# Altium PCB RadarControl_V1.00.PcbDoc
Units mil, origin at the board's own origin, x right, y up, seen from the top; angles counter-clockwise.
Board outline 6000 x 4000 mil, 2 copper layers (Top Layer, Bottom Layer); 75 components, 66 nets, 258 pads, 19 vias.
Unrouted connection lines stored in the file: 138.
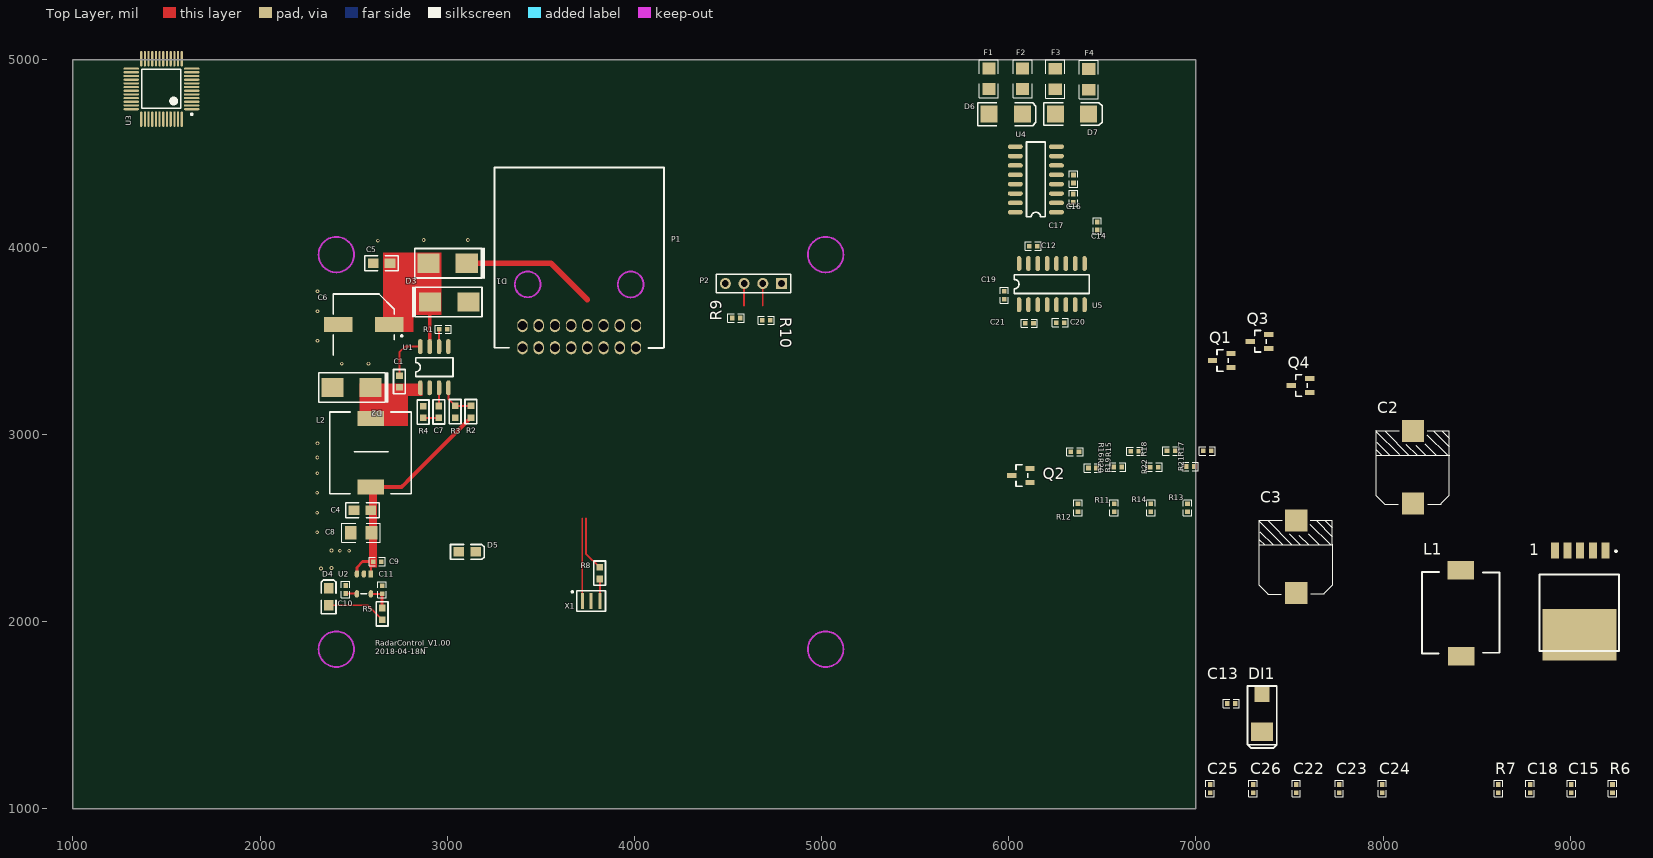
[diagram p0: Top Layer view]
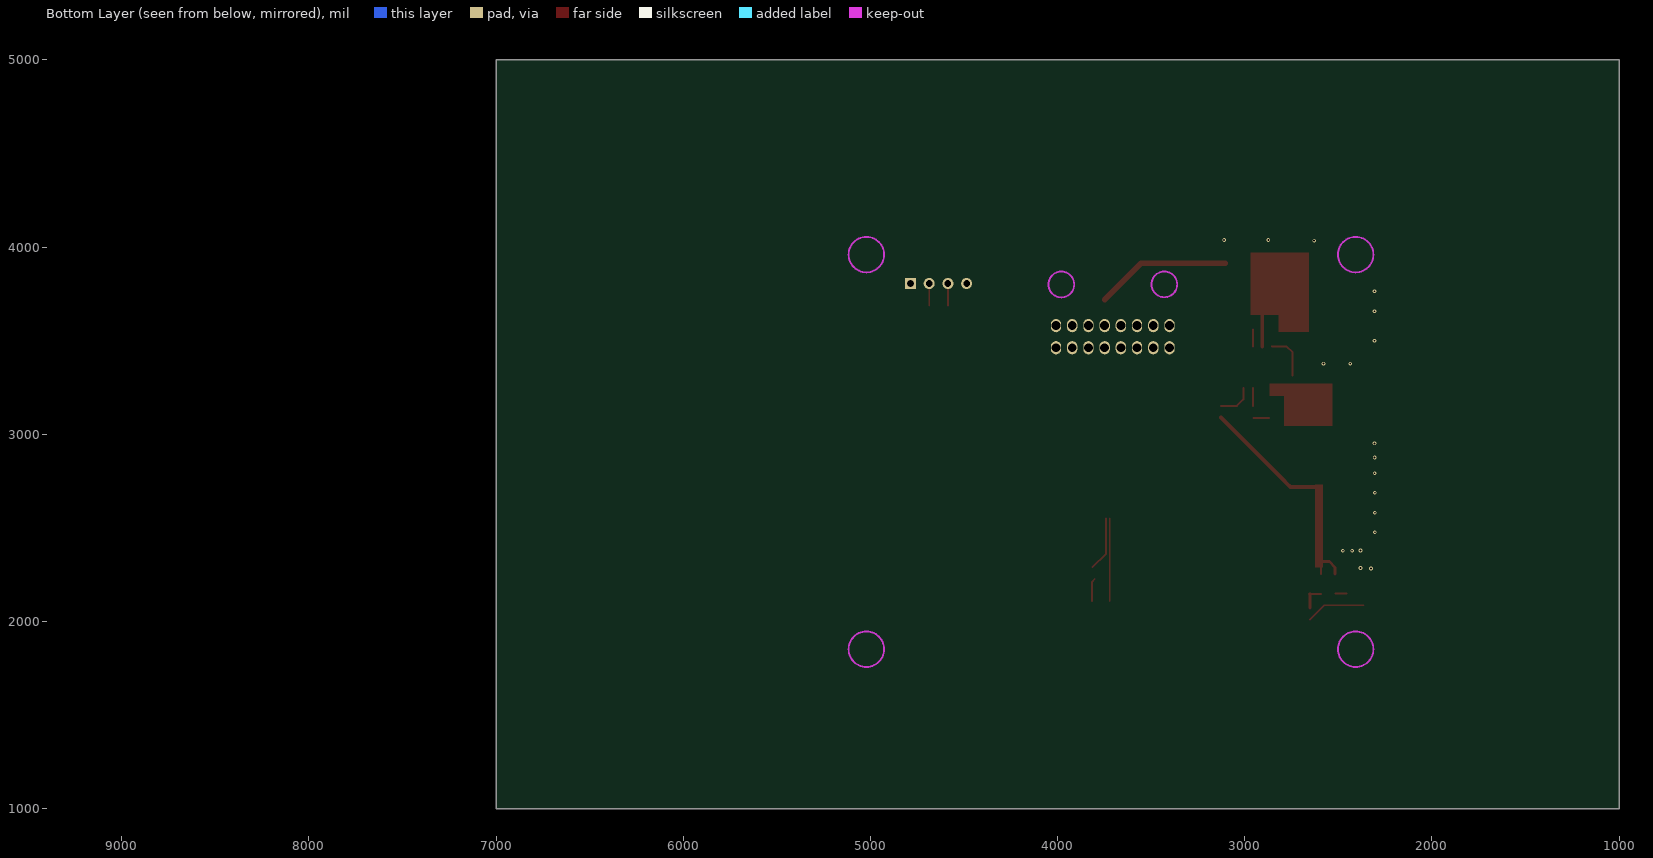
[diagram p1: Bottom Layer view, seen from below]

## Layer stack, top to bottom
Top Solder: solder mask 0.4, Solder Resist, Dk 3.5
Top Layer: signal copper 1.4
Dielectric1: dielectric 12.6, FR-4, Dk 4.8
Bottom Layer: signal copper 1.4
Bottom Solder: solder mask 0.4, Solder Resist, Dk 3.5

## Board outline
1000,1000 7000,1000 7000,5000 1000,5000

## Design rules (kind name [scope] priority, off if disabled: settings)
Clearance [All] p1: gap=5
FabricationTestpoint [(IsPad And (OnTopLayer Or OnBottomLayer))] p1: side=3 testpointundercomponent=TRUE minsize=40 maxsize=100 preferedsize=60 minholesize=0 maxholesize=40 preferedholesize=32 testpointgrid=1 allowsidetop=TRUE allowsidebottom=TRUE usegrid=TRUE gridtolerance=0.01
MinimumSolderMaskSliver [All] p1 off: minsoldermaskwidth=10
PolygonConnect [All] p1: connectstyle=Relief reliefconductorwidth=10 reliefentries=4 polygonreliefangle="90 Angle" airgapwidth=10
RoutingVias [All] p1: holewidth=28 width=50 viastyle="Through Hole" minholewidth=28 minwidth=50 maxholewidth=28 maxwidth=50
SilkToSilkClearance [All] p1 off: silktosilkclearance=10
SilkToSolderMaskClearance [IsPad] p1 off: minsilkscreentomaskgap=10 clearancetoexposedcopper=TRUE
SolderMaskExpansion [All] p1: expansion=4
Width [All] p1: maxlimit=30 minlimit=10 preferedwidth=10
26 further rules are at their usual default settings.

## Components (designator, comment, footprint, x,y, rotation, side; value= is the part's Value field where it differs from the comment)
1 "LM2576/LM2576HV-12.0" LM25761 9261,1842 r90 top
C1 "100nF" 0603 2749,3220 r180 top
C2 "Cap Pol1" Cap-100uF-220uF 8243,2593 r90 top
C3 "Cap Pol1" Cap-100uF-220uF 7618,2114 r90 top
C4 "22uF" 0805 2547,2594 r0 top
C5 "10uF" 0805 2649,3914 r0 top
C6 "47uF" cap_pol_8*10.2 2554,3586 r180 top
C7 "150pF" 0603 2960,3058 r180 top
C8 "22uF" 1206 2595,2473 r180 top
C9 "100nF" 0402 2519,2315 r90 top
C10 "NULL" 0402 2461,2064 r180 top
C11 "1uF" 0402 2656,2063 r180 top
C12 "100nf" 0402 6024,4001 r90 top
C13 "100nf" 0402 7083,1557 r90 top
C14 "100nf" 0402 6469,4219 r0 top
C15 "100nf" 0402 9002,1213 r0 top
C16 "100nf" 0402 6350,4257 r180 top
C17 "100nf" 0402 6349,4155 r180 top
C18 "100nf" 0402 8782,1213 r0 top
C19 "100nf" 0402 5972,3849 r0 top
C20 "100nf" 0402 6169,3592 r90 top
C21 "100nf" 0402 6004,3589 r90 top
C22 "100nF" 0402 7532,1213 r0 top
C23 "100nF" 0402 7762,1213 r0 top
C24 "100nF" 0402 7992,1213 r0 top
C25 "100nF" 0402 7072,1213 r0 top
C26 "1uF" 0402 7302,1213 r0 top
D1 "1N4007" B290#1 3103.91,3913.37 r180 top
D2 "B290-13-F" B290#1 2590.72,3250 r180 top
D3 "SMAJ36CA" B290#2 2908,3707 r0 top
D4 "LED_POWER" 0805-LED 2366,2131 r90 top
D5 "LED0" 0805-LED 3107,2371 r0 top
D6 "SMBJ18CA" SMB 5984,4710 r0 top
D7 "SMBJ18CA" SMB 6338,4711 r0 top
DI1 "SS510" SS510 7432,1341 r90 top
F1 "SMD1206-010" 1206 5894,4954 r270 top
F2 "SMD1206-010" 1206 6074,4954 r270 top
F3 "SMD1206-010" 1206 6249,4953 r270 top
F4 "SMD1206-010" 1206 6427,4951 r270 top
L1 "Inductor" GDRH104R-1R0MT 8415,1869 r90 top
L2 "22uH" 10*10Inductor 2591,2718 r0 top
P1 "1318382(16PIN)" "16pin 1318382" 4120,3480 r180 top
P2 "2.54mm/4pin" HDR1X4 4786,3805 r180 top
Q1 "LMBT3904LT1G" LC-SOT-23(SOT-23-3) 7138,3394 r0 top
Q2 "LMBT3904LT1G" LC-SOT-23(SOT-23-3) 6065,2779 r0 top
Q3 "LMBT3904LT1G" LC-SOT-23(SOT-23-3) 7340,3496 r0 top
Q4 "LMBT3904LT1G" LC-SOT-23(SOT-23-3) 7559,3260 r0 top
R1 "200K" 0402 2872,3557 r90 top
R2 "205K" 0603 3131,3059 r180 top
R3 "40.2K" 0603 3038,3181 r0 top
R4 "100k" 0603 2875,3057 r180 top
R5 "510R" 0603 2648,2101 r0 top
R6 "2.2K" 0402 9222,1213 r0 top
R7 "10K" 0402 8612,1213 r0 top
R8 "100" 0603 3810,2319 r0 top
R9 "1K" 0402 4437,3617 r90 top
R10 "1K" 0402 4811,3613 r270 top
R11 "10K" 0402 6567,2500 r180 top
R12 "10K" 0402 6374,2500 r180 top
R13 "10K" 0402 6959,2500 r180 top
R14 "10K" 0402 6763,2500 r180 top
R15 "100k" 0402 6567.24,2904.75 r90 top
R16 "100k" 0402 6460,2910 r270 top
R17 "100k" 0402 6954.76,2907.25 r90 top
R18 "100k" 0402 6760.95,2907.25 r90 top
R19 "10K" 0402 6689.28,2828.75 r270 top
R20 "10K" 0402 6341,2815 r90 top
R21 "10K" 0402 7076.8,2831.25 r270 top
R22 "10K" 0402 6883,2828 r270 top
U1 "MP2565DN" so-8 2856,3248 r90 top
U2 "RT9013-33GB" SOT-23-5 2553,2206 r180 top
U3 "STM32F103C8T6" STM-LQFP48_M 1473,4845 r180 top
U4 "SP3232EEN" SO-16 6255,4186 r180 top
U5 "SP3232EEN" SO-16 6055,3692 r90 top
X1 "8M smd" 8M 3721.47,2108.53 r0 top

## Footprints (in the part's own frame and the unit in brackets; to place one, negate y for a bottom-side part, rotate by r counter-clockwise, add the part's x,y. Pads: shape width x height; smd on the part's side, far side on the other; paste and mask are expansions set on the pad)
8M [mm]
  rect 0.4x2.2 smd: 1(0,0) 2(1.2,0) 3(2.4,0)
  silkscreen extent -1.45,-1.39 3.13,1.4
10*10Inductor [mm]
  rect 3.6x2 smd: 1(0,0) 2(0,9.3)
  silkscreen extent -5.55,-0.92 5.49,10.19
"16pin 1318382" [mm] "1318382"
  oval 1.4x1.8 hole 1.2: 1(2.835,-2.542) 2(5.035,-2.542) 3(7.235,-2.542) 4(9.435,-2.542) 5(11.635,-2.542) 6(13.835,-2.542) 7(16.035,-2.542) 8(18.235,-2.542) 9(2.835,0.458) 10(5.035,0.458) 11(7.235,0.458) 12(9.435,0.458) 13(11.635,0.458) 14(13.835,0.458) 15(16.035,0.458) 16(18.235,0.458)
  Keep-Out Layer circle w0.254: c3.556,-8.128 r1.75
  Keep-Out Layer circle w0.254: c17.535,-8.142 r1.75
  silkscreen extent -0.96,-24 22.04,0.51
0402 [mil]
  rect 25x25 smd: 1(3.98,-127.99) 2(3.98,-84.98)
  silkscreen extent -19,-150 26,-63
0603 [mil]
  rect 35x35 smd: 1(4.25,-92.76) 2(4.25,-29.76)
  silkscreen extent -27,-126 36,4
0805 [mil]
  rect 57x50 smd: 1(-45,0) 2(45,0)
  silkscreen extent -90,-40 90,40
0805-LED [mil]
  rect 57x50 smd: 1(-45,0) 2(45,0)
  silkscreen extent -90,-40 90,40
1206 [mm]
  rect 1.6x1.8 smd: 1(0,0) 2(2.8,0)
  silkscreen extent -1.2,-1.3 4,1.3
B290#1 [mm]
  rect 3x2.6 smd: 1(5.2,0) 2(0,0)
  silkscreen extent -2.34,-2 7.06,2
B290#2 [mm]
  rect 3x2.6 smd: 1(0,0) 2(5.2,0)
  silkscreen extent -2.34,-2 7.06,2
Cap-100uF-220uF [mm]
  rect 3x3 smd: 1(0.94,2.083) 2(10.795,2.083)
  silkscreen extent 0.81,-2.87 10.85,7.15
cap_pol_8*10.2 [mm]
  rect 3.9x2.05 smd: 1(-3.443,-0.001) 2(3.457,-0.001)
  silkscreen extent -5.27,-4.15 4.16,4.15
GDRH104R-1R0MT [mil]
  rect 98.43x141.73 smd: 1(-55,-2) 2(403,-1)
  silkscreen extent -40,-208 395,207
HDR1X4 [mm] "Connector; Header; 4 Position"
  rect 1.5x1.5 hole 0.9: 1(0,0)
  round 1.5 hole 0.9: 2(2.54,0) 3(5.08,0) 4(7.62,0)
  silkscreen extent -1.27,-1.27 8.89,1.27
LC-SOT-23(SOT-23-3) [mm]
  rect 1.25x0.7 smd: 1(1.25,0.95) 2(1.25,-0.95) 3(-1.25,0)
  silkscreen extent -0.65,-1.46 0.9,1.46
LM25761 [mil]
  rect 275.59x393.7 smd: 0(86,211)
  rect 85.04x42.13 smd: 1(536,73) 2(536,140) 3(536,208) 4(536,276) 5(536,343)
  silkscreen extent 0,0 538,425
SMB [mm] "DO-214-AA/SMB; 2 C-Bend Leads; Body 5.3 x 3.6 mm, inc. leads (LxW)"
  rect 2.3x2.3 smd: 1(-2.25,0) 2(2.25,0)
  silkscreen extent -3.8,-1.55 4.1,1.55
so-8 [mil]
  oval 80x24 smd: 1(0,0) 2(0,-50) 3(0,-100) 4(0,-150) 5(220,-150) 6(220,-100) 7(220,-50) 8(220,0)
  silkscreen extent 60,-175 160,25
SO-16 [mil]
  oval 80x24 smd: 1(0,0) 2(0,-50) 3(0,-100) 4(0,-150) 5(0,-200) 6(0,-250) 7(0,-300) 8(0,-350) 9(220,-350) 10(220,-300) 11(220,-250) 12(220,-200) 13(220,-150) 14(220,-100) 15(220,-50) 16(220,0)
  silkscreen extent 60,-375 160,25
SOT-23-5 [mm]
  rect 0.6x1 smd: 1(-0.995,-1.201)
  oval 0.6x1 smd: 2(-0.045,-1.201) 3(0.905,-1.201) 4(0.905,1.499) 5(-0.995,1.499)
  silkscreen extent -0.4,1.5 0.4,1.5, body extent -1.5,-1.3 1.4,1.5, height 1.2
SS510 [mil]
  rect 98.43x118.11 smd: 1(70,79)
  rect 78.74x78.74 smd: 2(268,79)
  silkscreen extent -17,0 314,157
STM-LQFP48_M [mm] "QFP, 48-Leads, Body 7x7mm, Pitch 0.5mm, IPC Low Density"
  oval 2.1x0.3 smd: 1(-4.1,2.75) 2(-4.1,2.25) 3(-4.1,1.75) 4(-4.1,1.25) 5(-4.1,0.75) 6(-4.1,0.25) 7(-4.1,-0.25) 8(-4.1,-0.75) 9(-4.1,-1.25) 10(-4.1,-1.75) 11(-4.1,-2.25) 12(-4.1,-2.75) 25(4.1,-2.75) 26(4.1,-2.25) 27(4.1,-1.75) 28(4.1,-1.25) 29(4.1,-0.75) 30(4.1,-0.25) 31(4.1,0.25) 32(4.1,0.75) 33(4.1,1.25) 34(4.1,1.75) 35(4.1,2.25) 36(4.1,2.75)
  oval 0.3x2.1 smd: 13(-2.75,-4.1) 14(-2.25,-4.1) 15(-1.75,-4.1) 16(-1.25,-4.1) 17(-0.75,-4.1) 18(-0.25,-4.1) 19(0.25,-4.1) 20(0.75,-4.1) 21(1.25,-4.1) 22(1.75,-4.1) 23(2.25,-4.1) 24(2.75,-4.1) 37(2.75,4.1) 38(2.25,4.1) 39(1.75,4.1) 40(1.25,4.1) 41(0.75,4.1) 42(0.25,4.1) 43(-0.25,4.1) 44(-0.75,4.1) 45(-1.25,4.1) 46(-1.75,4.1) 47(-2.25,4.1) 48(-2.75,4.1)
  silkscreen extent -4.23,-2.65 2.65,3.57, body extent -3.5,-3.5 3.5,3.5, height 1.6

## Part data
1: library part LM2576-FIX
C1 C7 C8 C10 C12 C13 C14 C15 C16 C17 C18 C19 C20 C21 C22 C23 C24 C25 C26: library part Cap, "Capacitor"
C2 C3: "Polarized Capacitor (Radial)"
C4 C5: library part Cap, "Capacitor,50V"
C6: library part "Cap Pol1", "Polarized Capacitor (Radial)"
C9: library part Cap, "Capacitor 5V"
C11: library part Cap, "Capacitor 3V3"
D1 D3: library part "Diode 1N4007", "1 Amp General Purpose Rectifier"
D2: library part Diode, "Default Diode"
D4: library part LED0, "Typical INFRARED GaAs LED"
D5: "green LED"
D6 D7: library part "D Zener", "Zener Diode"
F1 F2 F3 F4: library part "Fuse 2", "Fuse"
L2: library part Inductor, "Inductor, 1A"
P1: library part 16PIN
P2: library part "Header 4", "Header, 4-Pin"
Q1 Q2 Q3 Q4: library part 2N3904, "NPN General Purpose Amplifier"
R1 R2 R3 R4 R5 R6 R7 R8 R9 R10 R11 R12 R13 R14 R15 R16 R17 R18 R19 R20 R21 R22: library part Res1, "Resistor"
U1: library part MP1584, "DCDC 4.5V~28V input 1.8V ~5V output low power"
U2: library part RT9193
U3: "ARM Cortex-M3 32-bit MCU, 64 KB Flash, 20 KB Internal RAM, 37 I/Os, 48-pin LQFP, -40 to 85 degC, Tray"
U4 U5: library part MAX202

## Via types
v1: diameter 20, hole 10, Top Layer to Bottom Layer, 19 vias

## Nets (pads, with @x,y where several pads share a name; then routed paths per layer and width w, separated by ;. In a path a pad name is that pad's centre, name@x,y a point inside that pad or via, vN(x,y) a via of type N, cw(c..) or ccw(c..) an arc to the next point about the centre after c; other vN are vias at no path point)
12V: 1.4 C3.1 L1.2 P1.4
24V: D1.2 P1.3 | length 725.4
  Top Layer w30: D1.2 3553.63,3913.37 3748.54,3718.46
232_RXD1: P1.6 U5.8
232_RXD2: F4.1 P1.1
232_RXD3: F2.1 P1.9
232_TXD1: P1.5 U5.7
232_TXD2: F3.1 P1.2
232_TXD3: F1.1 P1.10
A5V0: C4.2 C8.1 C9.2 L2.1 R2.2 U2.1 U2.3 | length 895.4
  Top Layer w10: U2.1 C9.2@2592.17,2318.98 ; C9.2@2592.17,2325.02 C9.2@2592.17,2318.98 ; C9.2 C9.2@2592.17,2318.98 ; 2779,2741.02 2784.49,2746.51
  Top Layer w15: U2.3 2517.37,2288.37 2547.98,2318.98 C9.2@2592.17,2318.98
  Top Layer w20: L2.1 2755.98,2718 2779,2741.02 ; 2784.49,2746.51 R2.2
BACKDOOR: P1.16 R15.2
CAN_RX: U3.32
CAN_TX: U3.33
D3V3: C11.2 C12.2 C15.2 C22.2 C23.2 C24.2 C25.2 C26.2 R5.2 R6.2 R11.2 R12.2 R13.2 R14.2 U2.5 U3.1 U3.9 U3.24 U3.36 U3.48 U4.16 U5.16 | length 142.7
  Top Layer w10: U2.5 2651.03,2146.98 C11.2 ; C11.2@2653.01,2145 2655.01,2147 C11.2@2657.01,2145
  Top Layer w15: R5.2@2652.02,2071.24 C11.2
DGND: 1.3 1.5 C2.2 C3.2 C4.1 C5.1 C6.2 C8.2 C9.1 C10.1 C11.1 C12.1 C13.1 C14.1 C15.1 C18.1 C19.1 C22.1 C23.1 C24.1 C25.1 C26.1 D2.1 D3.2 D4.2 DI1.2 P1.11 P1.12 P2.1 Q1.1 Q2.1 Q3.1 Q4.1 R1.1 R3.1 R4.1 R7.2 R9.2 R10.2 R19.1 R20.1 R21.1 R22.1 U1.5 U2.2 U3.8 U3.23 U3.35 U3.47 U4.15 U5.15 X1.2
FRONTDOOR: P1.8 R16.2
Net1_1: 1.1 C2.1
Net1_2: 1.2 DI1.1 L1.1
NetC1_1: C1.1 U1.8 | length 249
  Top Layer w10: C1.1 2744.75,3436.75 2777,3469 2855,3469 U1.8
NetC1_2: C1.2 D2.2 L2.2 U1.1
NetC5_2: C5.2 C6.1 D1.1 D3.1 U1.7 | length 237
  Top Layer w20: U1.7 D3.1@2906,3705
NetC7_1: C7.1 U1.3 | length 97
  Top Layer w10: C7.1@2956,3151.01 U1.3
NetC7_2: C7.2 R4.2 | length 84
  Top Layer w10: R4.2 C7.2@2954.75,3086.76
NetC10_2: C10.2 U2.4 | length 58.4
  Top Layer w10: C10.2 U2.4@2515.38,2148.98
NetC13_2: C13.2 U4.6
NetC14_2: C14.2 U4.2
NetC16_1: C16.1 U4.5
NetC16_2: C16.2 U4.4
NetC17_1: C17.1 U4.3
NetC17_2: C17.2 U4.1
NetC18_2: C18.2 U5.6
NetC19_2: C19.2 U5.2
NetC20_1: C20.1 U5.5
NetC20_2: C20.2 U5.4
NetC21_1: C21.1 U5.3
NetC21_2: C21.2 U5.1
NetD4_1: D4.1 R5.1 | length 318.5
  Top Layer w10: D4.1 2574.5,2086 R5.1
NetD5_1: D5.1 R6.1
NetD5_2: D5.2 U3.39
NetQ1_2: Q1.2 R15.1 R19.2
NetQ2_2: Q2.2 R16.1 R20.2
NetQ3_2: Q3.2 R17.1 R21.2
NetQ4_2: Q4.2 R18.1 R22.2
NetR1_2: R1.2 U1.6 | length 92
  Top Layer w10: U1.6 R1.2@2956,3560
NetR2_1: R2.1 R3.2 U1.4 | length 193.7
  Top Layer w10: U1.4@3007.49,3246.51 3007.49,3186 R3.2 R2.1@3126.23,3151.24
NetR7_1: R7.1 U3.44
NetR8_1: R8.1 X1.3 | length 123.8
  Top Layer w10: R8.1@3801.25,2226.24 3815.96,2211.54 X1.3
NetR8_2: R8.2 U3.6 | length 290.8
  Top Layer w10: 3741.16,2549.58 3741.16,2361.84 R8.2@3814.01,2288.99
NetU3_5: U3.5 X1.1 | length 441.1
  Top Layer w10: X1.1 3721.47,2549.58
PB1: Q3.3 R13.1 U3.19
PB3: Q1.3 R11.1 U3.38
PB4: Q2.3 R12.1 U3.40
PB13: Q4.3 R14.1 U3.26
REVERSE: P1.7 R17.2
RT-IN1: D6.2 F2.2 U4.13
RT-IN2: D7.2 F4.2 U4.8
RT-OUT1: D6.1 F1.2 U4.14
RT-OUT2: D7.1 F3.2 U4.7
SPEED: P1.15 R18.2
SWCLK: P2.2 R10.1 U3.34 | length 117
  Top Layer w10: 4686,3687.99 P2.2
SWDIO: P2.3 R9.1 U3.37 | length 117.5
  Top Layer w10: 4585.76,3687.25 P2.3@4585.76,3804.76
USART1_RX: U3.31 U5.9
USART1_TX: U3.30 U5.10
USART2_RX: U3.13 U4.9
USART2_TX: U3.12 U4.10
USART3_RX: U3.22 U4.12
USART3_TX: U3.21 U4.11
pads on no net: 1.0 P1.13 P1.14 P2.4 U1.2 U3.2 U3.3 U3.4 U3.7 U3.10 U3.11 U3.14 U3.15 U3.16 U3.17 U3.18 U3.20 U3.25 U3.27 U3.28 U3.29 U3.41 U3.42 U3.43 U3.45 U3.46 U5.11 U5.12 U5.13 U5.14
copper on no net:
  other v1: 2326,2283 2382,2285 2426,2377 2476,2377 2381,2378 2305,2476 2305,2580 2305,2687 2306,2791 2306,2876 2307,2951 2436,3377 2579,3377 2307,3499 2307,3657 2307,3764 2629,4034 2874,4037 3110,4037

## Keep-outs
Keep-Out Layer:
  circle w10: c2407.42,1851.31 r94.87
  circle w10: c5021.59,1851.31 r94.87
  circle w10: c5021.59,3959.57 r94.87
  circle w10: c2407.42,3959.57 r94.87

## Other copper
Top Layer:
  rectangle net NetC5_2: 2657,3545 2819,3637
  rectangle net NetC5_2: 2657,3637 2969,3971
  rectangle net NetC1_2: 2590,3076 2590.72,3250
  rectangle net NetC1_2: 2530,3044 2791,3272
  rectangle net NetC1_2: 2791,3204 2869,3272
  rectangle net A5V0: 2581,2287 2624,2732

## Silkscreen, mask and mechanical layers (free items; w line width, h text height)
Top Overlay:
  text "RadarControl_V1.00 / 2018-04-18N" at 2616,1825 h30
Mechanical 1:
  circle w0.5: c2407.42,3959.57 r82.68
  circle w0.5: c5021.59,3959.57 r82.68
  circle w0.5: c2407.42,1851.31 r82.68
  circle w0.5: c5021.59,1851.31 r82.68
  lines w0.5: 2260.75,1759.08 ccw(c2296.08,1759.08) 2296.08,1723.75 5132.45,1723.75 ccw(c5132.45,1757.59) 5166.28,1757.59 5166.28,4046.74 ccw(c5126.91,4046.74) 5126.91,4086.11 2300.12,4086.11 ccw(c2300.12,4046.74) 2260.75,4046.74 2260.75,1759.08
Mechanical 10:
  lines w0.5: 5011.59,1851.31 5031.59,1851.31 5011.59,1851.31 ; 5021.59,1841.31 5021.59,1861.31 5021.59,1841.31
Mechanical 16:
  lines w0.5: 2265.69,1725.32 2265.69,4085.56 ; 4486.99,2297.78 4486.99,2397.78 4882.65,2397.78 4882.65,2297.78 4486.99,2297.78